# EAGLE board CMoy-Pro-Buffer-Board-V_1_0_0_1a (EAGLE 6.4)
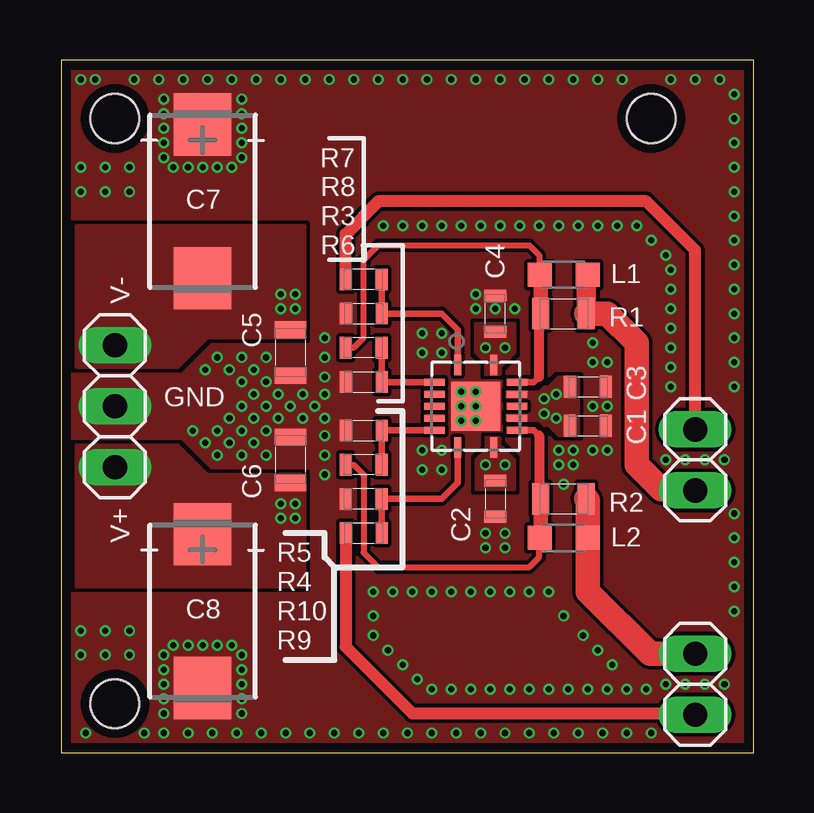
[diagram p0: board, top side]
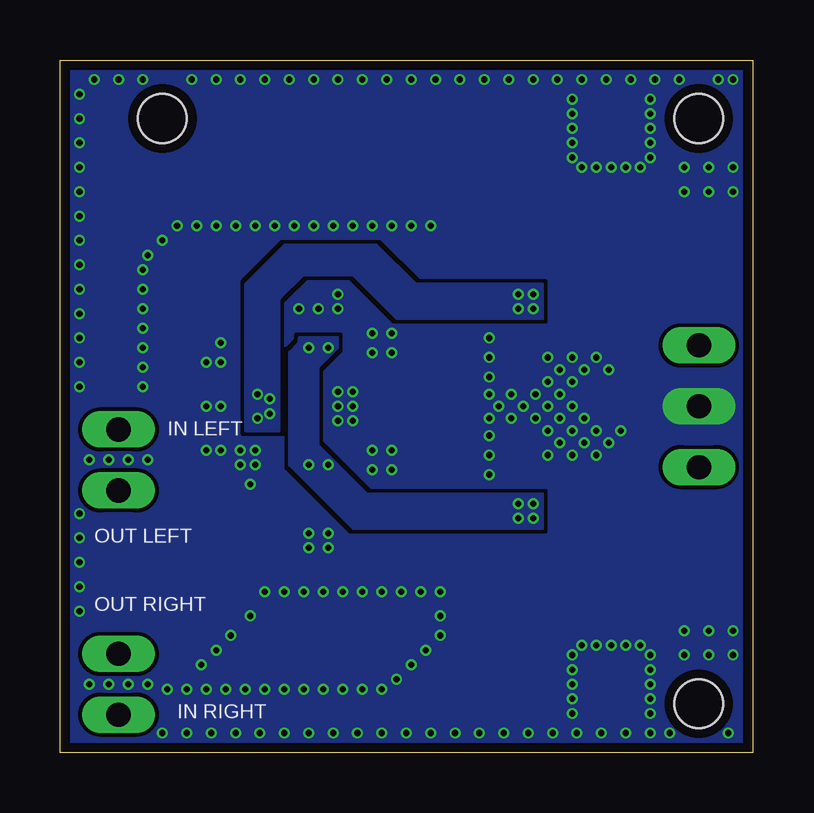
[diagram p1: board, bottom side, seen from below]

Size 28.85 x 28.85 mm. Coordinates in mm from the lower left corner, seen from the top.
Outline: 28.85,0 28.85,28.85 0,28.85 0,0 28.85,0
Copper layers (1*16): Top 0.035mm / dielectric 1.5mm / Bottom 0.035mm
Design rules "default *": minimum track width 6mil, minimum drill 10mil, track to track 6mil, track to pad 6mil, pad to pad 6mil, via to via 6mil, smd to smd 6mil, copper to edge 16mil, drill to drill 8mil, minimum pad ring 4mil, minimum via ring 4mil, stop-mask expansion 4mil, vias tented up to drill 24mil, thermal gap 10mil
Holes 2.03 mm at 2.24,26.42 24.59,26.42 2.24,2.03

## Footprints (pad centres in the part's own frame; a part is rotated, then mirrored left to right if it is on the bottom)
0603L3 = smd 0.5 x 0.9: P$1 -0.75,0; P$2 0.75,0
0805L3 = smd 0.7 x 1.3: 1 -0.95,0; 2 0.95,0
CT7343 = smd 2.6 x 2.4: + -3.2,0; - 3.2,0
1X03 = drill 1.016 long: 1 -2.54,0; 2 0,0; 3 2.54,0
1X02 = drill 1.016 long: 1 -1.27,0; 2 1.27,0
L2012C = smd 1 x 1: 1 -1,0; 2 1,0
S-PVQFN-N14 = smd 0.85 x 0.28: 1 -1.725,-0.75; 7 1.725,-0.75; 8 1.725,0.75; 14 -1.725,0.75 | smd 0.28 x 0.85: 2 -1,-1.725; 3 -0.5,-1.725; 4 0,-1.725; 5 0.5,-1.725; 6 1,-1.725; 9 1,1.725; 10 0.5,1.725; 11 0,1.725; 12 -0.5,1.725; 13 -1,1.725 | smd 2.05 x 2.05: TP 0,0

## Placement (x,y rotation side)
C1  100n  [0603L3]  21.95,13.61 0 top
C2  100n  [0603L3]  18.08,10.57 270 top
C3  100n  [0603L3]  21.95,15.24 0 top
C4  100n  [0603L3]  18.08,18.29 90 top
C5  10u  [0805L3]  9.55,16.66 270 top
C6  10u  [0805L3]  9.55,12.19 270 top
C7  100u  [CT7343]  5.89,22.96 270 top
C8  100u  [CT7343]  5.89,5.89 270 top
JP1  [1X03]  2.24,14.43 90 top
JP2  [1X02]  26.42,12.19 270 top
JP3  [1X02]  26.42,2.84 90 top
L1  [L2012C]  20.93,19.91 0 top
L2  [L2012C]  20.93,8.94 0 top
OA1  [S-PVQFN-N14]  17.27,14.43 270 top
R1  [0805L3]  20.93,18.29 0 top
R2  [0805L3]  20.93,10.57 0 top
R3  1K  [0603L3]  12.6,16.87 180 top
R4  1K  [0603L3]  12.6,11.99 180 top
R5  1K  [0603L3]  12.6,13.41 0 top
R6  1K  [0603L3]  12.6,15.44 0 top
R7  49.9R  [0603L3]  12.6,19.71 180 top
R8  4.02K  [0603L3]  12.6,18.29 0 top
R9  49.9R  [0603L3]  12.6,9.14 0 top
R10  4.02K  [0603L3]  12.6,10.57 180 top

## Library data of the parts
C1-C6 OA1 R1-R10 = common
C7 C8 L1 L2 = rcl
JP1-JP3 = pinhead

## Nets
GND: C1.P$2 C2.P$2 C3.P$2 C4.P$2 C5.2 C6.1 C7.+ C8.- JP1.2 OA1.TP R5.P$1 R6.P$1 R8.P$1 R10.P$2
N$1: L2.1 OA1.9 R2.1 R4.P$2
N$2: JP3.2 L2.2 R2.2
N$3: OA1.6 R4.P$1 R5.P$2
N$4: L1.1 OA1.13 R1.1 R3.P$2
N$5: JP2.2 L1.2 R1.2
N$6: OA1.2 R3.P$1 R6.P$2
N$7: OA1.1 R7.P$1 R8.P$2
N$8: JP3.1 R9.P$1
N$9: OA1.7 R9.P$2 R10.P$1
N$12: JP2.1 R7.P$2
V+: C2.P$1 C4.P$1 C6.2 C8.+ JP1.1 OA1.8 OA1.14
V-: C1.P$1 C3.P$1 C5.1 C7.- JP1.3 OA1.10 OA1.12

## Tracks (layer width: path | path; a pad name or v marks a point on that pad's centre or on a via)
GND  (via drill 0.25)
  other vias: 14.22,21.95 13,6.71 16.66,15.04 16.66,14.43 16.66,13.82 17.27,13.82 17.27,15.04 17.27,14.43 15.04,21.95 13.41,21.95 15.85,21.95 16.66,21.95 17.48,21.95 18.29,21.95 19.1,21.95 19.91,21.95 20.73,21.95 21.54,21.95 22.35,21.95 23.16,21.95 23.98,21.95 24.59,21.34 25.2,20.73 25.4,20.12 25.4,19.3 13,5.69 13,4.88 13.61,4.27 14.22,3.66 14.83,3.05 15.44,2.64 16.26,2.64 17.07,2.64 17.88,2.64 18.69,2.64 19.51,2.64 20.32,2.64 21.13,2.64 21.95,2.64 22.76,2.64 23.57,2.64 24.38,2.64 15.04,12.6 15.04,11.79 22.76,12.6 22.76,14.43 22.76,16.26 22.15,12.6 22.15,14.43 22.15,16.26 25.2,12.19 26.01,12.19 26.82,12.19 27.64,12.19 15.04,17.48 15.04,16.66 10.97,17.27 10.97,16.46 10.97,15.65 10.97,14.94 10.97,13.92 10.97,13.21 10.97,12.4 10.97,11.58 4.27,27.23 4.27,26.62 4.27,26.01 4.27,25.4 4.27,24.79 4.67,24.38 5.28,24.38 5.89,24.38 7.52,25.4 7.52,24.79 7.11,24.38 6.5,24.38 6.5,4.47 4.27,4.06 4.27,2.24 4.27,2.84 4.27,3.45 5.28,4.47 5.89,4.47 4.67,4.47 7.52,1.63 7.52,2.24 7.52,2.84 7.52,3.45 7.52,4.06 7.11,4.47 6.5,16.46 7.52,16.46 8.53,16.46 6.5,13.41 6.5,12.4 7.52,15.44 7.52,14.43 7.52,13.41 7.52,12.4 8.53,15.44 8.53,14.43 8.53,13.41 8.53,12.4 5.49,13.41 9.55,14.43 26.82,2.84 27.64,2.84 26.01,2.84 25.2,2.84 7.52,26.01 7.52,26.62 7.52,27.23 4.27,1.63 8.03,14.94 9.04,14.94 9.04,13.92 8.03,13.92 7.01,13.92 5.99,15.95 7.01,15.95 8.03,15.95 7.01,12.9 8.03,12.9 5.99,12.9 10.57,14.43 10.06,13.92 10.06,14.94 0.81,24.38 1.83,24.38 2.84,24.38 0.81,23.37 1.83,23.37 2.84,23.37 17.27,18.49 18.9,18.49 18.49,9.14 17.68,9.14 0.81,4.06 1.83,4.06 2.84,4.06 0.81,5.08 1.83,5.08 2.84,5.08 0.81,28.04 1.42,28.04 3.05,28.04 4.06,28.04 5.08,28.04 6.1,28.04 7.11,28.04 8.13,28.04 9.14,28.04 10.16,28.04 11.18,28.04 12.19,28.04 13.21,28.04 14.22,28.04 15.24,28.04 16.26,28.04 17.27,28.04 18.29,28.04 19.3,28.04 20.32,28.04 21.34,28.04 22.35,28.04 23.37,28.04 25.4,28.04 26.42,28.04 27.43,28.04 24.59,0.81 23.57,0.81 22.56,0.81 21.54,0.81 20.52,0.81 19.51,0.81 18.49,0.81 17.48,0.81 16.46,0.81 15.44,0.81 14.43,0.81 13.41,0.81 12.4,0.81 11.38,0.81 10.36,0.81 9.35,0.81 8.33,0.81 7.32,0.81 6.3,0.81 5.28,0.81 4.27,0.81 3.45,0.81 1.02,0.81 13.82,6.71 14.63,6.71 15.44,6.71 16.26,6.71 17.07,6.71 17.88,6.71 18.69,6.71 19.51,6.71 20.32,6.71 20.93,5.69 21.74,4.88 22.35,4.27 22.96,3.66 17.27,19.1 18.08,18.49 15.85,11.79 15.85,12.6 15.85,17.48 15.85,16.66 22.15,17.07 20.73,12.6 21.34,12.6 20.73,11.99 21.34,11.99 20.93,11.18 28.04,27.43 28.04,26.42 28.04,25.4 28.04,24.38 28.04,23.37 28.04,22.35 28.04,21.34 28.04,20.32 28.04,19.3 28.04,18.29 28.04,17.27 28.04,16.26 28.04,15.24 28.04,9.96 28.04,8.94 28.04,7.92 28.04,6.91 28.04,5.89 17.68,8.53 18.49,8.53 25.4,18.49 25.4,17.68 25.4,16.87 25.4,16.05 25.4,15.24
  pour Bottom (rank 6, no thermals): 0.41,28.45 28.45,28.45 28.45,0.41 0.41,0.41
  pour Top (rank 6, no thermals): 0.41,28.45 28.45,28.45 28.45,0.41 0.41,0.41
N$1
  Top 0.254: R4.P$2 12.19,11.99 12.6,11.58 12.6,8.33 13.21,7.72 19.51,7.72 19.91,8.13 19.91,8.93 L2.1
  Top 0.279: OA1.9 19.69,13.43 19.91,13.21
  Top 0.406: 19.91,13.21 19.91,10.63 R2.1
  Top 0.61: L2.1 19.98,8.94 R2.1
N$2
  Top 0.813: L2.2 21.95,8.94 21.95,9.75
  Top 1.016: JP3.2 24.54,4.12 21.95,6.71 21.95,9.75 21.95,10.5 R2.2
N$3
  Top 0.279: OA1.6 13.36,13.43 R5.P$2 R4.P$1
N$4
  Top 0.254: R3.P$2 12.19,16.87 12.6,17.27 12.6,20.52 13.21,21.13 19.51,21.13 19.91,20.73 19.91,19.93 L1.1
  Top 0.279: OA1.13 19.69,15.43 19.91,15.65
  Top 0.406: 19.91,15.65 19.91,17.82 R1.1
  Top 0.61: 19.98,19.91 R1.1
  Top 0.813: L1.1 19.98,19.91
N$5
  Top 0.813: L1.2 21.88,19.91 R1.2
  Top 1.016: R1.2 22.76,18.29 23.98,17.07 23.98,11.99 24.99,10.97 26.36,10.97 JP2.2
N$6
  Top 0.279: OA1.2 13.36,15.43 R6.P$2 R3.P$1
N$7
  Top 0.279: OA1.1 16.52,17.62 15.85,18.29 R8.P$2 R7.P$1
N$8
  Top 0.508: R9.P$1 11.85,4.41 14.63,1.63 26.36,1.63 JP3.1
N$9
  Top 0.279: OA1.7 16.52,11.24 15.85,10.57 R10.P$1 R9.P$2
N$12
  Top 0.508: JP2.1 26.42,20.93 24.38,22.96 13.21,22.96 11.85,21.6 R7.P$2
V+  (via drill 0.25)
  other vias: 17.68,16.87 18.49,16.87 17.68,11.99 18.49,11.99 9.14,10.36 9.75,10.36 9.14,9.75 9.75,9.75
  pour Top (no thermals): 0.61,12.8 0.61,6.91 10.16,6.91 10.16,11.58 6.1,11.58 4.88,12.8
  pour Bottom: 8.74,10.77 16.05,10.77 18.08,12.8 18.08,16.05 17.27,16.87 17.27,17.27 18.9,17.27 18.9,17.07 19.3,16.66 19.3,11.99 16.66,9.35 8.74,9.35
  pour Top (no thermals): 17.68,13.11 17.68,12.6 17.27,12.19 17.27,10.97 18.9,10.97 18.9,12.19 18.29,12.8 18.29,13.11
  pour Top (no thermals): 17.68,15.75 17.68,16.26 17.27,16.66 17.27,17.88 18.9,17.88 18.9,16.66 18.29,16.05 18.29,15.75
V-  (via drill 0.25)
  other vias: 20.12,14.73 20.62,14.94 20.62,13.92 20.12,14.12 9.14,18.49 9.14,19.1 9.75,19.1 9.75,18.49
  pour Top (no thermals): 0.61,16.05 4.88,16.05 6.1,17.27 10.16,17.27 10.16,21.95 0.61,21.95
  pour Top (no thermals): 18.59,15.04 19.91,15.04 20.12,15.24 20.32,15.24 20.73,15.65 21.54,15.65 21.54,13.21 20.73,13.21 20.32,13.61 20.12,13.61 19.91,13.82 18.59,13.82
  pour Bottom: 8.74,19.51 14.02,19.51 15.65,21.13 19.51,21.13 21.13,19.51 21.13,13.41 19.71,13.41 19.71,18.9 18.69,19.91 16.66,19.91 14.83,18.08 8.74,18.08

## Text on the board
tPlace: V- | GND | V+
bPlace: IN LEFT | OUT LEFT | OUT RIGHT | IN RIGHT
Measures: CMoy | Overdrive | V1